# Altium PCB Driver_PCB - v7.PcbDoc
Units mm, origin at the board's own origin, x right, y up, seen from the top; angles counter-clockwise.
Board outline 35 x 27.1 mm, 2 copper layers (Top Layer, Bottom Layer); 50 components, 48 nets, 194 pads, 57 vias.
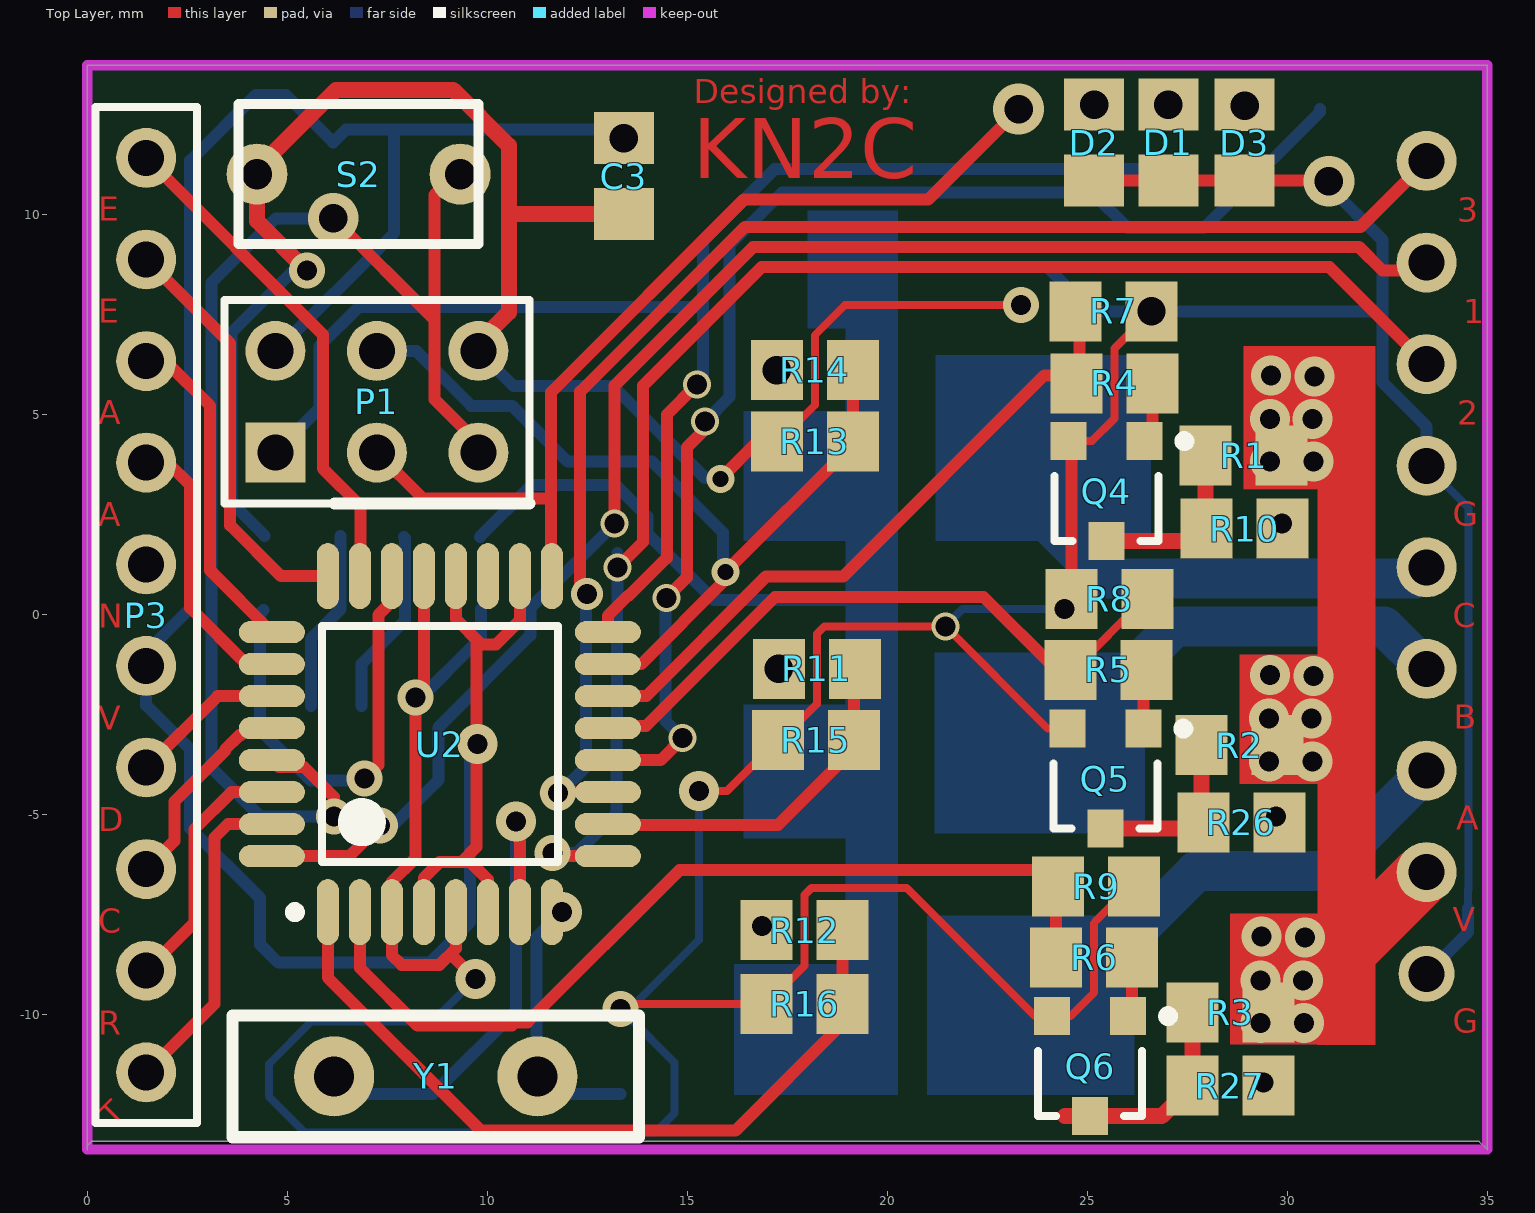
[diagram p0: Top Layer view]
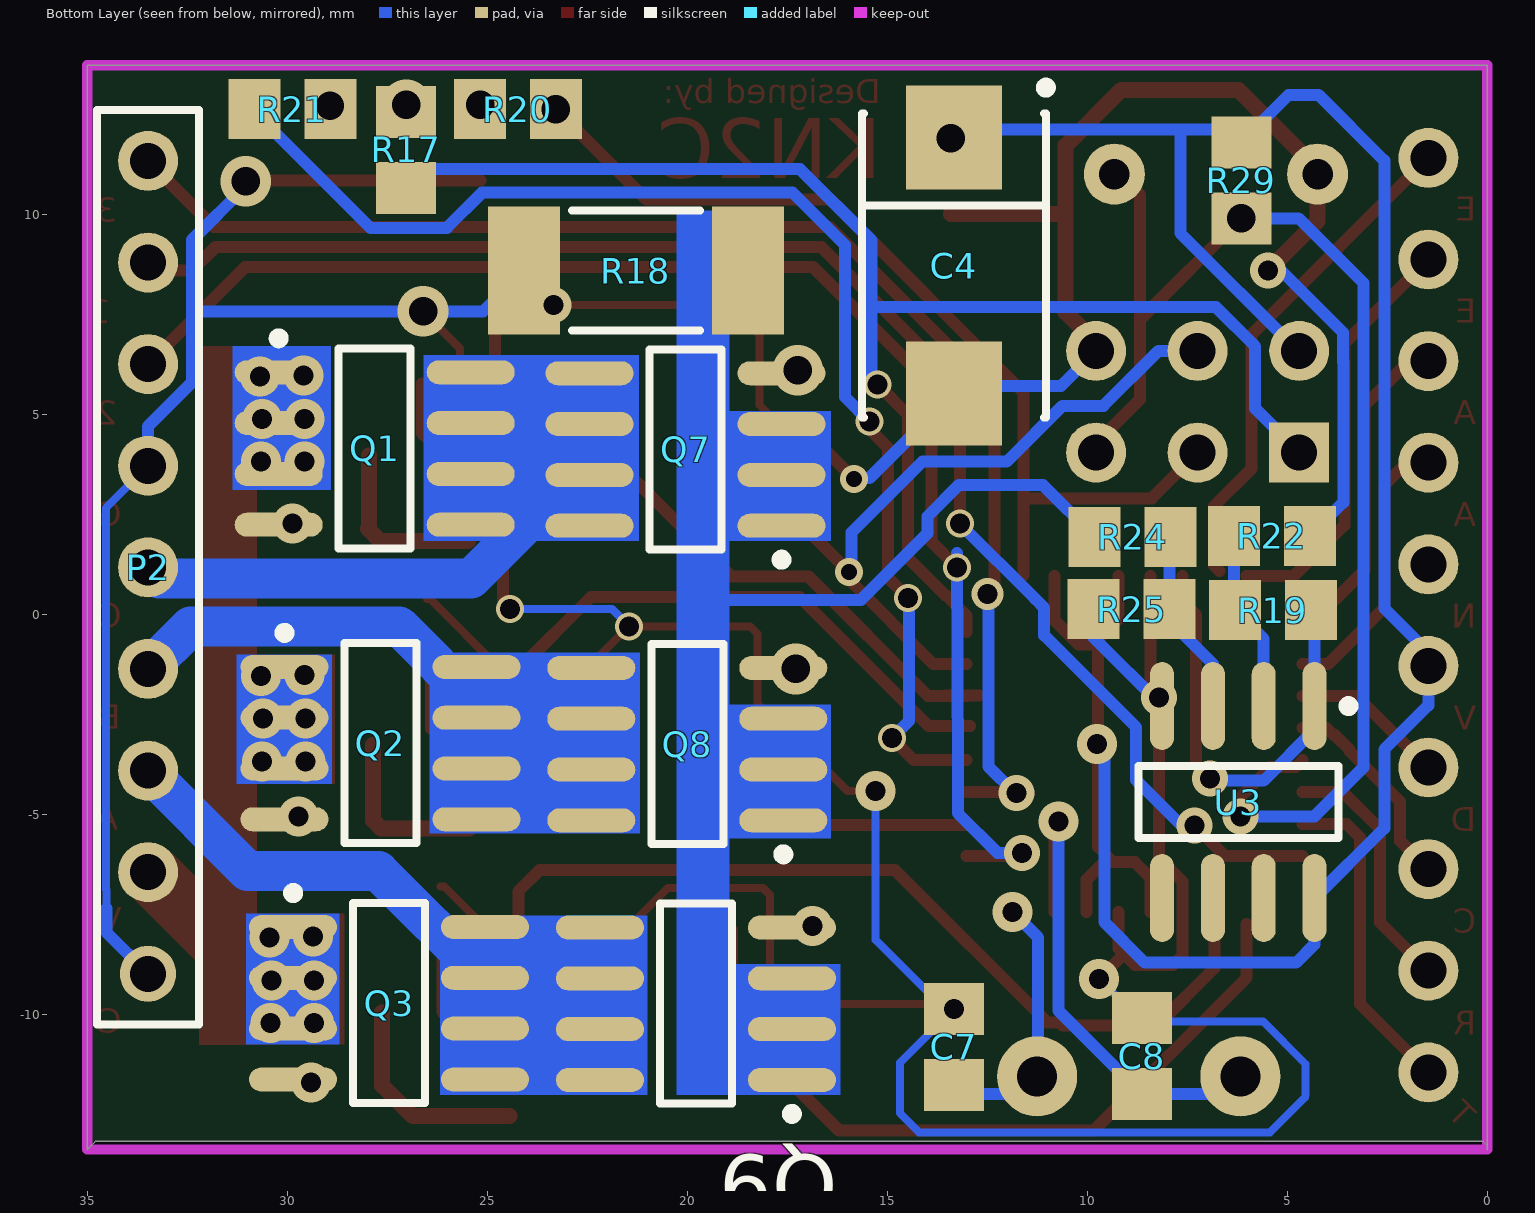
[diagram p1: Bottom Layer view, seen from below]

## Layer stack, top to bottom
Top Layer: signal copper 0.0356
Dielectric: dielectric 0.32, FR-4, Dk 4.8
Bottom Layer: signal copper 0.0356

## Board outline
0,13.719 34.997,13.719 34.997,-13.386 34.794,-13.183 0.102,-13.183 0,-13.284 0,-13.386 0,13.719

## Design rules (kind name [scope] priority, off if disabled: settings)
Clearance Clearance_2 [InPolygon vs InNet('GND')] p1 off: gap=0
Clearance Clearance_1 [InPolygon] p2: gap=0.3
Clearance [All] p3: gap=0.2
FabricationTestPointUsage TestPointUsage [All] p1: valid=0 allowmultiple=FALSE
FabricationTestpoint Testpoint [(IsPad And (OnTopLayer Or OnBottomLayer))] p1: side=3 testpointundercomponent=TRUE minsize=1.016 maxsize=2.54 preferedsize=1.524 minholesize=0 maxholesize=1.016 preferedholesize=0.813 testpointgrid=0.025 allowsidetop=TRUE allowsidebottom=TRUE usegrid=TRUE gridtolerance=0
HoleToHoleClearance [All] p1: gap=0.254 allowstackedmicrovias=FALSE
PolygonConnect [All] p1: connectstyle=Direct reliefconductorwidth=0.254 reliefentries=4 polygonreliefangle="90 Angle" airgapwidth=0.254
RoutingVias [All] p1: holewidth=0.5 width=1 viastyle="Through Hole" minholewidth=0.5 minwidth=1 maxholewidth=0.5 maxwidth=1
SilkToSolderMaskClearance SilkscreenOverComponentPads [IsPad] p1: minsilkscreentomaskgap=0.254 clearancetoexposedcopper=TRUE
SolderMaskExpansion [All] p1: expansion=0.102
Width [All] p1: maxlimit=3 minlimit=0.2 preferedwidth=0.2
24 further rules are at their usual default settings.

## Classes and differential pairs
component class Driver_Mosfet: C3 C4 Q1 Q2 Q3 Q4 Q5 Q6 Q7 Q8 Q9 R1 R2 R3 R4 R5 R6 R7 R8 R9 R10 R11 R12 R13 R14 R15 R16 R18 R26 R27
component class Driver_Sheet: C7 C8 D1 D2 D3 P1 P2 P3 R17 R19 R20 R21 R22 R24 R25 R29 S2 U2 U3 Y1

## Components (designator, comment, footprint, x,y, rotation, side; value= is the part's Value field where it differs from the comment)
C3 "Cap_UP" 2012[0805] 13.411,10.947 r270 top
C4 "Cap_El" 7343 13.335,8.712 r270 bottom
C7 "Cap_UP" 2012[0805] 13.335,-10.82 r270 bottom
C8 "Cap_UP" 2012[0805] 8.636,-11.049 r270 bottom
D1 "Diode" 2012[0805] 27.026,11.786 r270 top
D2 "Diode" 2012[0805] 25.171,11.786 r270 top
D3 "Diode" 2012[0805] 28.931,11.786 r270 top
P1 "Header 3X2" HDRBOX2X3 7.239,5.309 r0 top
P2 "Header 9" HDR1X9 33.48,-8.992 r90 bottom
P3 "Header 10" HDR1X10 1.473,-11.455 r90 top
Q1 "MOSFET-P-8PIN" SO-8_N 27.813,4.14 r180 bottom
Q2 "MOSFET-P-8PIN" SO-8_N 27.669,-3.226 r180 bottom
Q3 "MOSFET-P-8PIN" SO-8_N 27.452,-9.728 r180 bottom
Q4 "2N2222" SOT-23 25.476,3.073 r180 top
Q5 "2N2222" SOT-23 25.451,-4.115 r180 top
Q6 "2N2222" SOT-23 25.07,-11.303 r180 top
Q7 "MOSFET-N-8PIN" SO-8_N 20.041,4.115 r0 bottom
Q8 "MOSFET-N-8PIN" SO-8_N 19.998,-3.251 r0 bottom
Q9 "MOSFET-N-8PIN" SO-8_N 19.784,-9.742 r0 bottom
R1 "Res" 2012[0805] 28.905,3.962 r0 top
R2 "Res" 2012[0805] 28.804,-3.277 r0 top
R3 "Res" 2012[0805] 28.575,-9.957 r0 top
R4 "Res" 2012[0805] 25.679,5.766 r180 top
R5 "Res" 2012[0805] 25.527,-1.397 r180 top
R6 "Res" 2012[0805] 25.171,-8.585 r180 top
R7 "Res" 2012[0805] 25.654,7.569 r180 top
R8 "Res" 2012[0805] 25.552,0.381 r0 top
R9 "Res" 2012[0805] 25.222,-6.807 r180 top
R10 "Res" 2012[0805] 28.931,2.134 r0 top
R11 "Res" 2012[0805] 18.237,-1.372 r180 top
R12 "Res" 2012[0805] 17.932,-7.899 r180 top
R13 "Res" 2012[0805] 18.186,4.318 r0 top
R14 "Res" 2012[0805] 18.186,6.096 r180 top
R15 "Res" 2012[0805] 18.212,-3.15 r0 top
R16 "Res" 2012[0805] 17.932,-9.742 r0 top
R17 "Res" 2012[0805] 27.026,11.608 r90 bottom
R18 "DAIL" 6332[2512] 21.285,8.585 r180 bottom
R19 "Res" 2012[0805] 5.359,0.102 r0 bottom
R20 "Res" 2012[0805] 24.232,12.624 r0 bottom
R21 "Res" 2012[0805] 29.87,12.624 r180 bottom
R22 "Res" 2012[0805] 5.385,1.956 r180 bottom
R24 "Res" 2012[0805] 8.865,1.93 r0 bottom
R25 "Res" 2012[0805] 8.89,0.127 r180 bottom
R26 "Res" 2012[0805] 28.854,-5.207 r0 top
R27 "Res" 2012[0805] 28.575,-11.786 r0 top
R29 "Res" 2012[0805] 6.147,10.846 r90 bottom
S2 "SW-SPST" PUSH-BUT-SMD 6.782,10.998 r90 top
U2 "ATmega88PA-AU" 32A_N 8.814,-3.251 r90 top
U3 "LM358D" 751-02_N 6.223,-4.699 r270 bottom
Y1 "XTAL" XTALL 8.712,-11.557 r90 top

## Footprints (in the part's own frame and the unit in brackets; to place one, negate y for a bottom-side part, rotate by r counter-clockwise, add the part's x,y. Pads: shape width x height; smd on the part's side, far side on the other; paste and mask are expansions set on the pad)
32A_N [mm] "Thin QFP, 32-Leads, Body 7x7mm, Pitch 0.8mm, IPC Medium Density"
  oval 1.65x0.55 smd: 1(-4.2,2.8) 2(-4.2,2) 3(-4.2,1.2) 4(-4.2,0.4) 5(-4.2,-0.4) 6(-4.2,-1.2) 7(-4.2,-2) 8(-4.2,-2.8) 17(4.2,-2.8) 18(4.2,-2) 19(4.2,-1.2) 20(4.2,-0.4) 21(4.2,0.4) 22(4.2,1.2) 23(4.2,2) 24(4.2,2.8)
  oval 0.55x1.65 smd: 9(-2.8,-4.2) 10(-2,-4.2) 11(-1.2,-4.2) 12(-0.4,-4.2) 13(0.4,-4.2) 14(1.2,-4.2) 15(2,-4.2) 16(2.8,-4.2) 25(2.8,4.2) 26(2,4.2) 27(1.2,4.2) 28(0.4,4.2) 29(-0.4,4.2) 30(-1.2,4.2) 31(-2,4.2) 32(-2.8,4.2)
  silkscreen extent -4.32,-2.95 2.95,3.75, body extent -3.5,-3.5 3.5,3.5, height 1.2
751-02_N [mm] "SOIC, 8-Leads, Body 4.9x3.9mm, Pitch 1.27mm, IPC Medium Density"
  oval 2.2x0.6 smd: 1(-2.4,1.905) 2(-2.4,0.635) 3(-2.4,-0.635) 4(-2.4,-1.905) 5(2.4,-1.905) 6(2.4,-0.635) 7(2.4,0.635) 8(2.4,1.905)
  silkscreen extent -2.52,-2.5 0.9,2.88, body extent -1.95,-2.45 1.95,2.45, height 1.75
2012[0805] [mm] "Chip Resistor; Body 2.0 x 1.3 mm (LxW typ)"
  rect 1.3x1.5 smd: 1(-0.95,0) 2(0.95,0)
  body extent -1.22,-0.75 1.28,0.75, height 0.5
6332[2512] [mm] "Chip Resistor; Body 6.3 x 3.2 mm (LxW typ)"
  rect 1.8x3.2 smd: 1(-2.8,0) 2(2.8,0)
  silkscreen extent -1.6,-1.5 1.6,1.5, body extent -3.27,-1.6 3.37,1.6, height 0.5
7343 [mm] "Capacitor, SM Tantalum; Body 7.3 x 4.3 mm (LxW typ)"
  rect 2.6x2.4 smd: 1(-3.2,0) 2(3.2,0)
  silkscreen extent -4.57,-2.3 3.8,2.42, body extent -3.9,-2.4 3.9,2.4, height 2
HDR1X9 [mm] "Connector; Header; 9 Position"
  round 1.4 hole 0.9: 1(0,0)
  round 1.5 hole 0.9: 2(2.54,0) 3(5.08,0) 4(7.62,0) 5(10.16,0) 6(12.7,0) 7(15.24,0) 8(17.78,0) 9(20.32,0)
  silkscreen extent -1.27,-1.27 21.59,1.27
HDR1X10 [mm] "Connector; Header; 10 Position"
  round 1.5 hole 0.9: 1(0,0) 2(2.54,0) 3(5.08,0) 4(7.62,0) 5(10.16,0) 6(12.7,0) 7(15.24,0) 8(17.78,0) 9(20.32,0) 10(22.86,0)
  silkscreen extent -1.27,-1.27 24.13,1.27
HDRBOX2X3 [mm]
  rect 1.5x1.5 hole 0.9: 1(-2.54,-1.27)
  round 1.5 hole 0.9: 2(-2.54,1.27) 3(0,-1.27) 4(0,1.27) 5(2.54,-1.27) 6(2.54,1.27)
  silkscreen extent -3.81,-2.54 3.81,2.54
PUSH-BUT-SMD [mil]
  round 60 hole 30: 1(0,-100) 2(0,100)
  silkscreen extent -69,-118 69,118, body extent -69,-118 68,117, height 157
SO-8_N [mm] "8-Pin Small Outline Integrated Circuit 1.27 mm Pitch, IPC Medium Density"
  oval 2.2x0.6 smd: 1(-2.4,1.905) 2(-2.4,0.635) 3(-2.4,-0.635) 4(-2.4,-1.905) 5(2.4,-1.905) 6(2.4,-0.635) 7(2.4,0.635) 8(2.4,1.905)
  silkscreen extent -2.53,-2.5 0.9,2.88, body extent -1.95,-2.45 1.95,2.45, height 1.75
SOT-23 [mm] "SOT-23; 3 Leads; Body 3.0 x 2.6 mm, inc. leads (LxW max)"
  rect 0.9x0.95 smd: 1(0,1.25) 2(-0.95,-1.25) 3(0.95,-1.25)
  silkscreen extent -2.08,-1.37 1.3,1.25, body extent -1.33,-0.38 1.32,1.25, height 2
XTALL [mm]
  round 2 hole 1: 1(0,-2.54) 2(0,2.54)
  silkscreen extent -1.52,-5.08 1.52,5.08

## Part data
C3 C4 C7 C8: "Capacitor"
D1 D2 D3: "1 Amp General Purpose Rectifier"
P1: "Header, 3-Pin, Dual row"
P2: "Header, 9-Pin"
P3: "Header, 10-Pin"
Q1 Q2 Q3: "P-Channel MOSFET"
Q4 Q5 Q6: "NPN Bipolar Transistor"
Q7 Q8 Q9: "N-Channel MOSFET"
R1 R2 R3 R4 R5 R6 R7 R8 R9 R10 R11 R12 R13 R14 R15 R16 R17 R19 R20 R21 R22 R24 R25 R26 R27 R29: "Semiconductor Resistor"
R18: library part Res, "Semiconductor Resistor"
S2: "Single-Pole, Single-Throw Switch"
U2: "8-bit AVR Microcontroller, 8KB Flash, 512 Bytes EEPROM, 1KB SRAM, 32-pin TQFP, Industrial Grade (-40°C to 85°C)"
U3: "Dual Low-Power Operational Amplifier"
Y1: "Crystal Oscillator"

## Via types
v1: diameter 1, hole 0.5, Top Layer to Bottom Layer, 27 vias
v2: diameter 1.27, hole 0.711, Top Layer to Bottom Layer, 10 vias
v3: diameter 0.9, hole 0.5, Top Layer to Bottom Layer, 9 vias
v4: diameter 0.7, hole 0.5, Top Layer to Bottom Layer, 8 vias
v5: diameter 0.7, hole 0.4, Top Layer to Bottom Layer, 2 vias
v6: diameter 0.8, hole 0.5, Top Layer to Bottom Layer, 1 vias

## Nets (pads, with @x,y where several pads share a name; then routed paths per layer and width w, separated by ;. In a path a pad name is that pad's centre, name@x,y a point inside that pad or via, vN(x,y) a via of type N, cw(c..) or ccw(c..) an arc to the next point about the centre after c; other vN are vias at no path point)
ADD1: P3.8 U2.25 | length 8.4
  Top Layer w0.3: P3.8 1.956,6.325 3.073,5.207 3.073,1.089 U2.25
ADD2: P3.7 U2.26 | length 7
  Top Layer w0.3: P3.7 2.015,3.785 2.573,3.226 2.573,0.156 3.98,-1.251 U2.26
CURRENT: R19.1 U2.22 U3.1 | length 11.5
  Top Layer w0.3: v3(6.934,-4.115) 7.277,-3.772 7.277,-0.022 7.614,0.315 U2.22
  Bottom Layer w0.3: R19.1 4.318,0.01 U3.1 4.318,-2.896 5.588,-4.166 v3@6.883,-4.166
CURRENT_SENSE: Q7.1 Q7.2 Q7.3 Q8.1 Q8.2 Q8.3 Q9.1 Q9.2 Q9.3 R18.2 R24.2 | length 11.6
  Bottom Layer w0.3: R24.2 11.11,3.226 13.207,3.226 13.999,2.434 13.999,2.015 15.661,0.352 19.282,0.352 19.38,0.254
ENCODER1: P3.10 U2.23 | length 12.6
  Top Layer w0.3: P3.10 5.893,6.985 5.893,3.635 6.833,2.695 6.833,1.218 U2.23@6.689,1.074
ENCODER2: P3.9 U2.24 | length 10.5
  Top Layer w0.3: P3.9 3.573,6.765 3.573,2.218 4.842,0.949 U2.24
GND: C3.2 C4.2 C7.1 C8.1 D1.2 D2.2 D3.2 P1.6 P2.1 P2.6 Q4.3 Q5.3 Q6.3 R7.1 R8.1 R9.1 R13.1 R15.1 R16.1 R18.1 R22.2 R25.1 S2.2 U2.3 U2.5 U2.21 U3.4 | length 167.3
  Top Layer w0.2: v3@13.335,-10.185 v3@13.438,-10.185 ; v3@13.335,-9.742 R16.1 17.932,-8.792 17.932,-7.025 18.108,-6.849 20.486,-6.849 23.689,-10.053 Q6.3 24.578,-10.053 25.171,-9.459 25.171,-7.732 ; v1(15.291,-4.42) 15.992,-4.42 R15.1 17.334,-3.15 18.237,-2.246 18.237,-0.497 18.43,-0.305 v4(21.451,-0.305) 24.011,-2.865 Q5.3 ; R13.1@16.764,4.318 R13.1 17.283,4.318 18.186,5.222 18.186,6.97 18.938,7.722 v3(23.343,7.722) ; Q4.3 25.111,4.323 25.676,4.888 ; 25.222,-7.66 26.075,-6.807 R9.1 ; 25.679,4.926 25.679,6.64 26.604,7.565 v2(26.604,7.569)
  Top Layer w0.3: S2.2@4.178,10.998 S2.2@4.178,11.062 ; v3(8.204,-2.083) 8.204,-6.1 7.614,-6.691 U2.3 7.614,-8.528 7.857,-8.771 8.806,-8.771 9.214,-8.363 U2.5 ; v3@8.414,-1.88 U2.21 ; 9.214,-8.63 v1(9.703,-9.119) ; v5(15.824,3.378) R13.1@16.764,4.318 ; Q4.3 24.602,4.247 R8.1 ; D2.2 D1.2 D3.2 31.024,10.836 v2(31.039,10.82)
  Top Layer w0.4: S2.2@4.178,11.062 6.223,13.106 9.144,13.106 10.541,11.709 10.541,9.957 ; S2.2 4.242,9.83 v3(5.486,8.585) ; P1.6 9.779,6.782 10.541,7.544 10.541,9.957 ; C3.2 10.582,9.997 10.541,9.957
  Bottom Layer w0.2: 4.547,-12.019 4.547,-11.243 5.608,-10.181 8.554,-10.181 C8.1 8.722,-10.099 v1(9.703,-9.119) ; 4.557,-12.08 5.436,-12.959 14.199,-12.959 14.681,-12.477 14.681,-11.217 13.564,-10.099 13.335,-10.099 15.291,-8.143 v1(15.291,-4.42) ; v4(21.451,-0.305) 21.883,0.127 v4(24.435,0.127) ; P2.6 34.53,2.658 34.53,-6.887 34.52,-6.896 34.52,-7.366
  Bottom Layer w0.3: R22.2 3.599,2.792 3.599,6.299 3.599,7.034 5.15,8.585 v3(5.486,8.585) ; U3.4 9.84,-0.587 R25.1 ; P1.6 10.651,5.707 13.14,5.707 C4.2 15.444,3.404 v5@15.596,3.404 ; R18.1 25.101,7.569 v2(26.604,7.569) 32.38,7.569 ; v2(31.039,10.82) 31.039,10.693 32.38,9.352 32.38,5.793 33.48,4.693 P2.6 ; P2.1 34.52,-7.951 34.52,-7.366
  other v3: 13.335,-9.87
HALL1: P2.8 U2.32 | length 38.3
  Top Layer w0.3: U2.32 6.547,-6.051 v3(7.315,-5.283) ; v4@13.183,2.578 13.183,5.715 16.645,9.177 31.793,9.177 32.385,8.585 33.277,8.585 P2.8
  Bottom Layer w0.3: v3(7.315,-5.283) 7.645,-5.283 8.712,-4.216 8.723,-4.227 ; 8.778,-4.151 8.778,-2.83 11.074,-0.534 11.074,0.152 11.303,0.381 v4(13.183,2.261)
HALL2: P2.7 U2.9 | length 36.9
  Top Layer w0.3: v3(11.633,-5.969) 11.715,-6.051 U2.9 ; v4(13.257,1.168) 13.894,1.805 13.894,5.715 16.856,8.677 31.051,8.677 P2.7
  Bottom Layer w0.3: v3(11.633,-5.969) 12.243,-5.969 13.235,-4.976 13.235,-3.988 ; 13.234,-4.318 13.235,-3.988 ; 13.259,1.524 13.235,-3.988
HALL3: P2.9 U2.11 | length 35.6
  Top Layer w0.3: v3@11.475,-4.451 11.455,-4.47 v3(11.764,-4.47) ; v3@11.764,-4.451 U2.11 ; v6(12.497,0.508) 12.319,0.686 12.319,5.559 16.438,9.677 31.829,9.677 P2.9
  Bottom Layer w0.3: v3(11.764,-4.47) 11.811,-4.47 12.471,-3.81 12.471,0.483 v6(12.497,0.508)
LED1: R21.1 U2.12 | length 32.2
  Top Layer w0.3: U2.12 14.332,-3.651 v4(14.884,-3.099) ; v4(14.478,0.406) 14.986,0.914 14.986,4.166 15.443,4.623 v4@15.443,4.648
  Bottom Layer w0.3: v4@14.453,0.406 14.453,-2.667 v4(14.884,-3.099) ; v4@15.443,4.623 v4(15.443,4.812) 16.053,5.422 16.053,9.224 17.364,10.535 25.13,10.535 26.007,9.658 27.921,9.658 30.82,12.558 R21.1
LED2: P1.1 R17.1 U2.16 | length 36.5
  Top Layer w0.3: U2.16 13.014,-0.042 13.524,0.468 13.547,0.468 14.486,1.407 14.486,4.986 v4(15.24,5.74)
  Bottom Layer w0.3: P1.1 5.799,5.139 5.799,6.694 6.783,7.679 15.375,7.679 15.392,7.696 ; v4(15.24,5.74) 15.392,5.893 15.392,7.696 ; R17.1 26.558,11.125 17.179,11.125 15.392,9.339 15.392,7.696
LED3: P1.3 R20.1 U2.17 | length 24
  Top Layer w0.3: P1.3 8.382,2.896 11.59,2.896 ; U2.17 11.59,0.972 11.59,2.896 ; v2(23.282,12.624) 21.021,10.363 16.417,10.363 11.59,5.537 11.59,2.896
M1N: R12.1 R16.2 U2.1 | length 19.2
  Top Layer w0.3: U2.1@6.014,-7.747 6.014,-9.087 9.835,-12.909 16.207,-12.909 18.882,-10.233 R16.2 R12.1
M1P: R6.2 R9.2 U2.2 | length 22.9
  Top Layer w0.3: U2.2 6.814,-8.846 8.255,-10.287 10.613,-10.287 10.693,-10.207 11.002,-10.207 14.81,-6.399 23.688,-6.399 24.221,-6.933 R6.2
M2N: R11.1 R15.2 U2.10 | length 9
  Top Layer w0.3: U2.10 13.032,-5.27 17.27,-5.27 19.162,-3.378 R15.2 19.162,-1.397 R11.1
M2P: R5.2 R8.2 U2.13 | length 16.4
  Top Layer w0.2: R5.2 24.653,-1.397 26.431,0.381 R8.2
  Top Layer w0.3: U2.13@12.928,-2.801 13.963,-2.801 17.196,0.432 22.403,0.432 24.232,-1.397 R5.2
M3N: P1.4 R13.2 R14.1 U2.15 | length 22.3
  Top Layer w0.3: U2.15 13.845,-1.251 15.951,0.855 v5(15.951,1.052) 19.136,4.238 R13.2 R14.1 ; R13.2@19.238,3.973 R13.2@19.238,4.318
  Bottom Layer w0.3: P1.4 8.223,6.579 9.595,5.207 10.617,5.207 12.014,3.81 14.122,3.81 15.889,2.043 15.889,1.114 v5(15.951,1.052)
M3P: R4.2 R7.2 U2.14 | length 17.7
  Top Layer w0.3: U2.14@12.703,-2.032 U2.14@13.539,-2.032 ; U2.14 13.976,-2.051 16.967,0.94 18.898,0.94 23.927,5.969 R4.2@24.729,5.969 ; R4.2 24.806,5.842 R7.2@24.806,7.569
NetC7_2: C7.2 U2.8 Y1.1 | length 6.9
  Top Layer w0.3: U2.8 v1(11.862,-7.451)
  Bottom Layer w0.3: v1(11.862,-7.451) 11.227,-8.086 11.227,-11.481 11.745,-11.999 C7.2@13.335,-11.999
NetC8_2: C8.2 U2.7 Y1.2 | length 12.8
  Top Layer w0.3: v1@10.643,-5.258 v1(10.719,-5.182) ; U2.7 v1@10.814,-5.182
  Bottom Layer w0.3: Y1.2@6.147,-11.481 6.665,-11.999 C8.2 10.719,-9.916 v1(10.719,-5.182)
NetD1_1: D1.1 R17.2
  other v2: 27.026,12.736
NetD2_1: D2.1 R20.2
  other v2: 25.171,12.736
NetD3_1: D3.1 R21.2
  other v2: 28.931,12.711
NetQ1_4: Q1.4 R10.2 | length 0.1
  Top Layer w0.4: R10.2@29.82,2.311 v1(29.87,2.261)
NetQ2_4: Q2.4 R26.2 | length 0.4
  Top Layer w0.4: v1(29.72,-5.055) 30.048,-5.055 R26.2@30.074,-5.029
NetQ3_4: Q3.4 R27.2 | length 0.4
  Top Layer w0.4: v1(29.402,-11.709) 29.414,-11.697 R27.2@29.787,-11.697
NetQ4_1: Q4.1 R1.1 R10.1 | length 4.5
  Top Layer w0.4: Q4.1 27.67,1.823 R10.1 27.955,2.159 R1.1
NetQ4_2: Q4.2 R4.1 | length 1.5
  Top Layer w0.3: Q4.2 26.629,4.527 R4.1
NetQ5_1: Q5.1 R2.1 R26.1 | length 4.4
  Top Layer w0.4: Q5.1 27.645,-5.365 27.854,-5.156 R2.1
NetQ5_2: Q5.2 R5.1 | length 1.5
  Top Layer w0.3: Q5.2 26.401,-1.473 R5.1
NetQ6_1: Q6.1 R3.1 R27.1 | length 5.3
  Top Layer w0.4: 24.44,-12.553 Q6.1 26.858,-12.553 R27.1 R3.1
NetQ6_2: Q6.2 R6.1 | length 1.5
  Top Layer w0.3: Q6.2 26.121,-9.951 R6.1
NetQ7_4: Q7.4 R14.2
  other v2: 17.236,6.096
NetQ8_4: Q8.4 R11.2
  other v2: 17.287,-1.372
NetQ9_4: Q9.4 R12.2
  other v1: 16.866,-7.798
NetR19_2: R19.2 R22.1 U3.2 | length 4.6
  Bottom Layer w0.3: U3.2 5.588,-0.62 R19.2 6.335,0.127 R22.1
NetR24_1: R24.1 R25.2 U3.3 | length 4.7
  Bottom Layer w0.3: U3.3 6.858,-1.245 7.94,-0.163 R25.2 7.94,1.905 R24.1
PHASEA: P2.3 Q3.5 Q3.6 Q3.7 Q3.8 Q9.5 Q9.6 Q9.7 Q9.8 | length 10.6
  Bottom Layer w1: Q3.7 27.719,-6.426 30.987,-6.426 33.48,-3.934 P2.3
PHASEB: P2.4 Q2.5 Q2.6 Q2.7 Q2.8 Q8.5 Q8.6 Q8.7 Q8.8 | length 10.4
  Bottom Layer w0.4: 24.587,-2.921 25.269,-2.24
  Bottom Layer w1: 25.269,-2.24 27.203,-0.305 32.413,-0.305 P2.4
PHASEC: P2.5 Q1.5 Q1.6 Q1.7 Q1.8 Q7.5 Q7.6 Q7.7 Q7.8 | length 10.8
  Bottom Layer w1: 23.571,2.718 25.4,0.889 25.406,0.895 33.207,0.895 P2.5
RESET: P1.5 R29.1 S2.1 U2.29 | length 32.8
  Top Layer w0.3: U2.29 4.789,-3.826 5.423,-3.826 6.172,-4.576 v3(6.172,-5.055) ; v2(6.147,9.896) 6.149,9.896 8.679,7.366 ; S2.1@9.017,10.82 8.679,10.482 8.679,7.366 ; P1.5 9.779,4.267 8.679,5.367 8.679,7.366
  Bottom Layer w0.3: v2(6.147,9.896) 4.714,9.896 3.099,8.28 3.099,-3.835 4.318,-5.055 v3(6.172,-5.055)
RX: P3.2 U2.30 | length 6.4
  Top Layer w0.3: P3.2 2.675,-7.714 2.675,-5.381 3.605,-4.451 U2.30
TWI_CLK: P3.3 U2.28 | length 5.2
  Top Layer w0.3: P3.3 2.175,-5.674 2.175,-4.689 3.439,-3.425 3.439,-3.392 3.805,-3.026 3.838,-3.026 4.013,-2.851 U2.28
TWI_DATA: P3.4 U2.27 | length 3.9
  Top Layer w0.3: P3.4 3.257,-2.051 U2.27
TX: P3.1 U2.31 | length 8.2
  Top Layer w0.3: P3.1 3.175,-9.754 3.175,-5.588 3.512,-5.251 U2.31
VCC: C3.1 C4.1 P1.2 P3.5 R29.2 U2.4 U2.6 U2.18 U2.20 U3.8 | length 64
  Top Layer w0.3: U2.4 8.414,-6.598 8.81,-6.201 9.347,-6.201 ; U2.20 9.214,-0.121 9.855,-0.762 ; U2.6 10.014,-6.636 9.579,-6.201 9.347,-6.201 ; U2.18 10.814,-0.159 10.211,-0.762 9.728,-0.762 9.728,-5.82 9.347,-6.201
  Bottom Layer w0.3: P1.2 4.725,6.579 7.671,9.525 7.671,11.932 ; v1(9.754,-3.251) 9.562,-3.443 9.562,-4.108 9.573,-4.118 9.573,-7.699 8.56,-8.712 4.775,-8.712 4.318,-8.255 U3.8 2.573,-5.354 2.573,-3.38 1.473,-2.28 P3.5 1.473,-0.955 2.573,0.145 2.573,11.336 4.216,12.979 4.963,12.979 R29.2 6.461,12.11 13.137,12.11 C4.1
  other v2: 13.411,11.897
VDD: P2.2 Q1.1 Q1.2 Q1.3 Q2.1 Q2.2 Q2.3 Q3.1 Q3.2 Q3.3 R1.2 R2.2 R3.2 | length 4.5
  Top Layer w1.5: 29.852,-9.093 30.809,-9.093 P2.2@33.315,-6.587
  other v1: 29.326,-10.224 30.418,-10.224 29.326,-9.157 30.393,-9.157 30.444,-8.091 29.352,-8.065 29.54,-3.683 30.632,-3.683 29.54,-2.616 30.607,-2.616 30.658,-1.549 29.566,-1.524 29.566,3.81 30.658,3.81 29.566,4.877 30.632,4.877 30.683,5.944 29.591,5.969
pads on no net: P3.6 U2.19 U3.5 U3.6 U3.7

## Keep-outs
Keep-Out Layer:
  lines w0.254: 0,-13.386 34.997,-13.386 34.997,13.719 0,13.719 0,-13.386

## Other copper
Top Layer:
  rectangle net VDD: 28.564,-10.758 31.714,-7.481
  rectangle net VDD: 28.804,-4.242 31.775,-1.016
  rectangle net VDD: 28.905,3.124 32.21,6.706
  rectangle net VDD: 30.759,-10.77 32.21,6.706
  text "Designed by:" at 15.164,12.776 h0.6
  text "KN2C" at 15.138,10.897 h1.5
  text "E" at 0.279,9.83 h0.6
  text "3" at 34.252,9.804 h0.6
  text "E" at 0.279,7.287 h0.6
  text "1" at 34.395,7.271 h0.6
  text "A" at 0.279,4.743 h0.6
  text "2" at 34.252,4.737 h0.6
  text "A" at 0.279,2.2 h0.6
  text "G" at 34.138,2.203 h0.6
  text "N" at 0.279,-0.343 h0.6
  text "C" at 34.138,-0.33 h0.6
  text "B" at 34.166,-2.864 h0.6
  text "V" at 0.279,-2.886 h0.6
  text "A" at 34.223,-5.397 h0.6
  text "D" at 0.279,-5.429 h0.6
  text "V" at 34.138,-7.931 h0.6
  text "C" at 0.279,-7.972 h0.6
  text "G" at 34.138,-10.465 h0.6
  text "R" at 0.279,-10.516 h0.6
  text "T" at 0.66,-12.878 h0.6 r45
Bottom Layer:
  rectangle net VDD: 28.691,-10.758 31.028,-7.481
  rectangle net VDD: 28.88,-4.242 31.267,-1.016
  rectangle net VDD: 28.905,3.099 31.369,6.706
  rectangle net PHASEA: 20.995,-12.028 26.177,-7.532
  rectangle net PHASEB: 21.184,-5.486 26.441,-0.965
  rectangle net PHASEC: 21.209,1.829 26.594,6.477
  rectangle net CURRENT_SENSE: 16.169,-12.028 19.75,-8.751
  rectangle net CURRENT_SENSE: 16.408,-5.613 20.015,-2.261
  rectangle net CURRENT_SENSE: 18.948,-12.028 20.269,10.085
  rectangle net CURRENT_SENSE: 16.408,1.829 19.812,5.08
  rectangle net CURRENT_SENSE: 18.009,7.137 20.168,10.084

## Silkscreen, mask and mechanical layers (free items; w line width, h text height)
Top Solder:
  rectangle: 28.905,3.124 32.21,6.706
  rectangle: 30.759,-10.77 32.21,3.124
  rectangle: 28.753,-4.242 31.775,-1.016
  rectangle: 28.564,-10.795 31.953,-7.481
Bottom Solder:
  rectangle: 28.564,-10.77 30.759,-7.481
  rectangle: 28.804,-4.216 31.318,-1.016
  rectangle: 18.948,-12.065 20.295,10.211
  rectangle: 16.169,-12.028 19.75,-8.751
  rectangle: 16.408,-5.613 20.015,-2.261
  rectangle: 16.408,1.803 20.066,5.08
  rectangle: 21.209,1.823 26.67,6.477
  rectangle: 21.184,-5.486 26.441,-0.965
  rectangle: 20.995,-12.028 26.177,-7.532
  rectangle: 28.691,-10.758 31.028,-7.481
  rectangle: 28.905,3.212 31.42,6.706
  lines w0.254: 23.851,2.438 23.851,3.734 ; 24.867,-9.347 24.867,-9.278 ; 30.86,-6.553 30.987,-6.426 30.987,-6.404 ; 32.055,-0.305 32.131,-0.229 32.337,-0.229 ; 33.201,0.889 33.48,1.168 ; 33.325,-3.734 33.48,-3.889 33.48,-3.912
  lines w1: 23.851,2.438 25.4,0.889 33.201,0.889 ; 24.587,-2.921 27.203,-0.305 32.055,-0.305 ; 24.867,-9.278 27.592,-6.553 30.86,-6.553 ; 30.987,-6.404 33.48,-3.912 ; 32.337,-0.229 33.48,-1.372